# Altium PCB Rackmount_DSP.PcbDoc (part 4 of 24)
Units mil, origin at the board's own origin, x right, y up, seen from the top; angles counter-clockwise.
Board outline 10629.92 x 8267.72 mil, 4 copper layers (Top Layer, Mid Layer 1, Mid Layer 2, Bottom Layer), stack 36.2 mil thick; 4500 components, 1565 nets, 9765 pads, 3289 vias.
Unrouted connection lines stored in the file: 1.
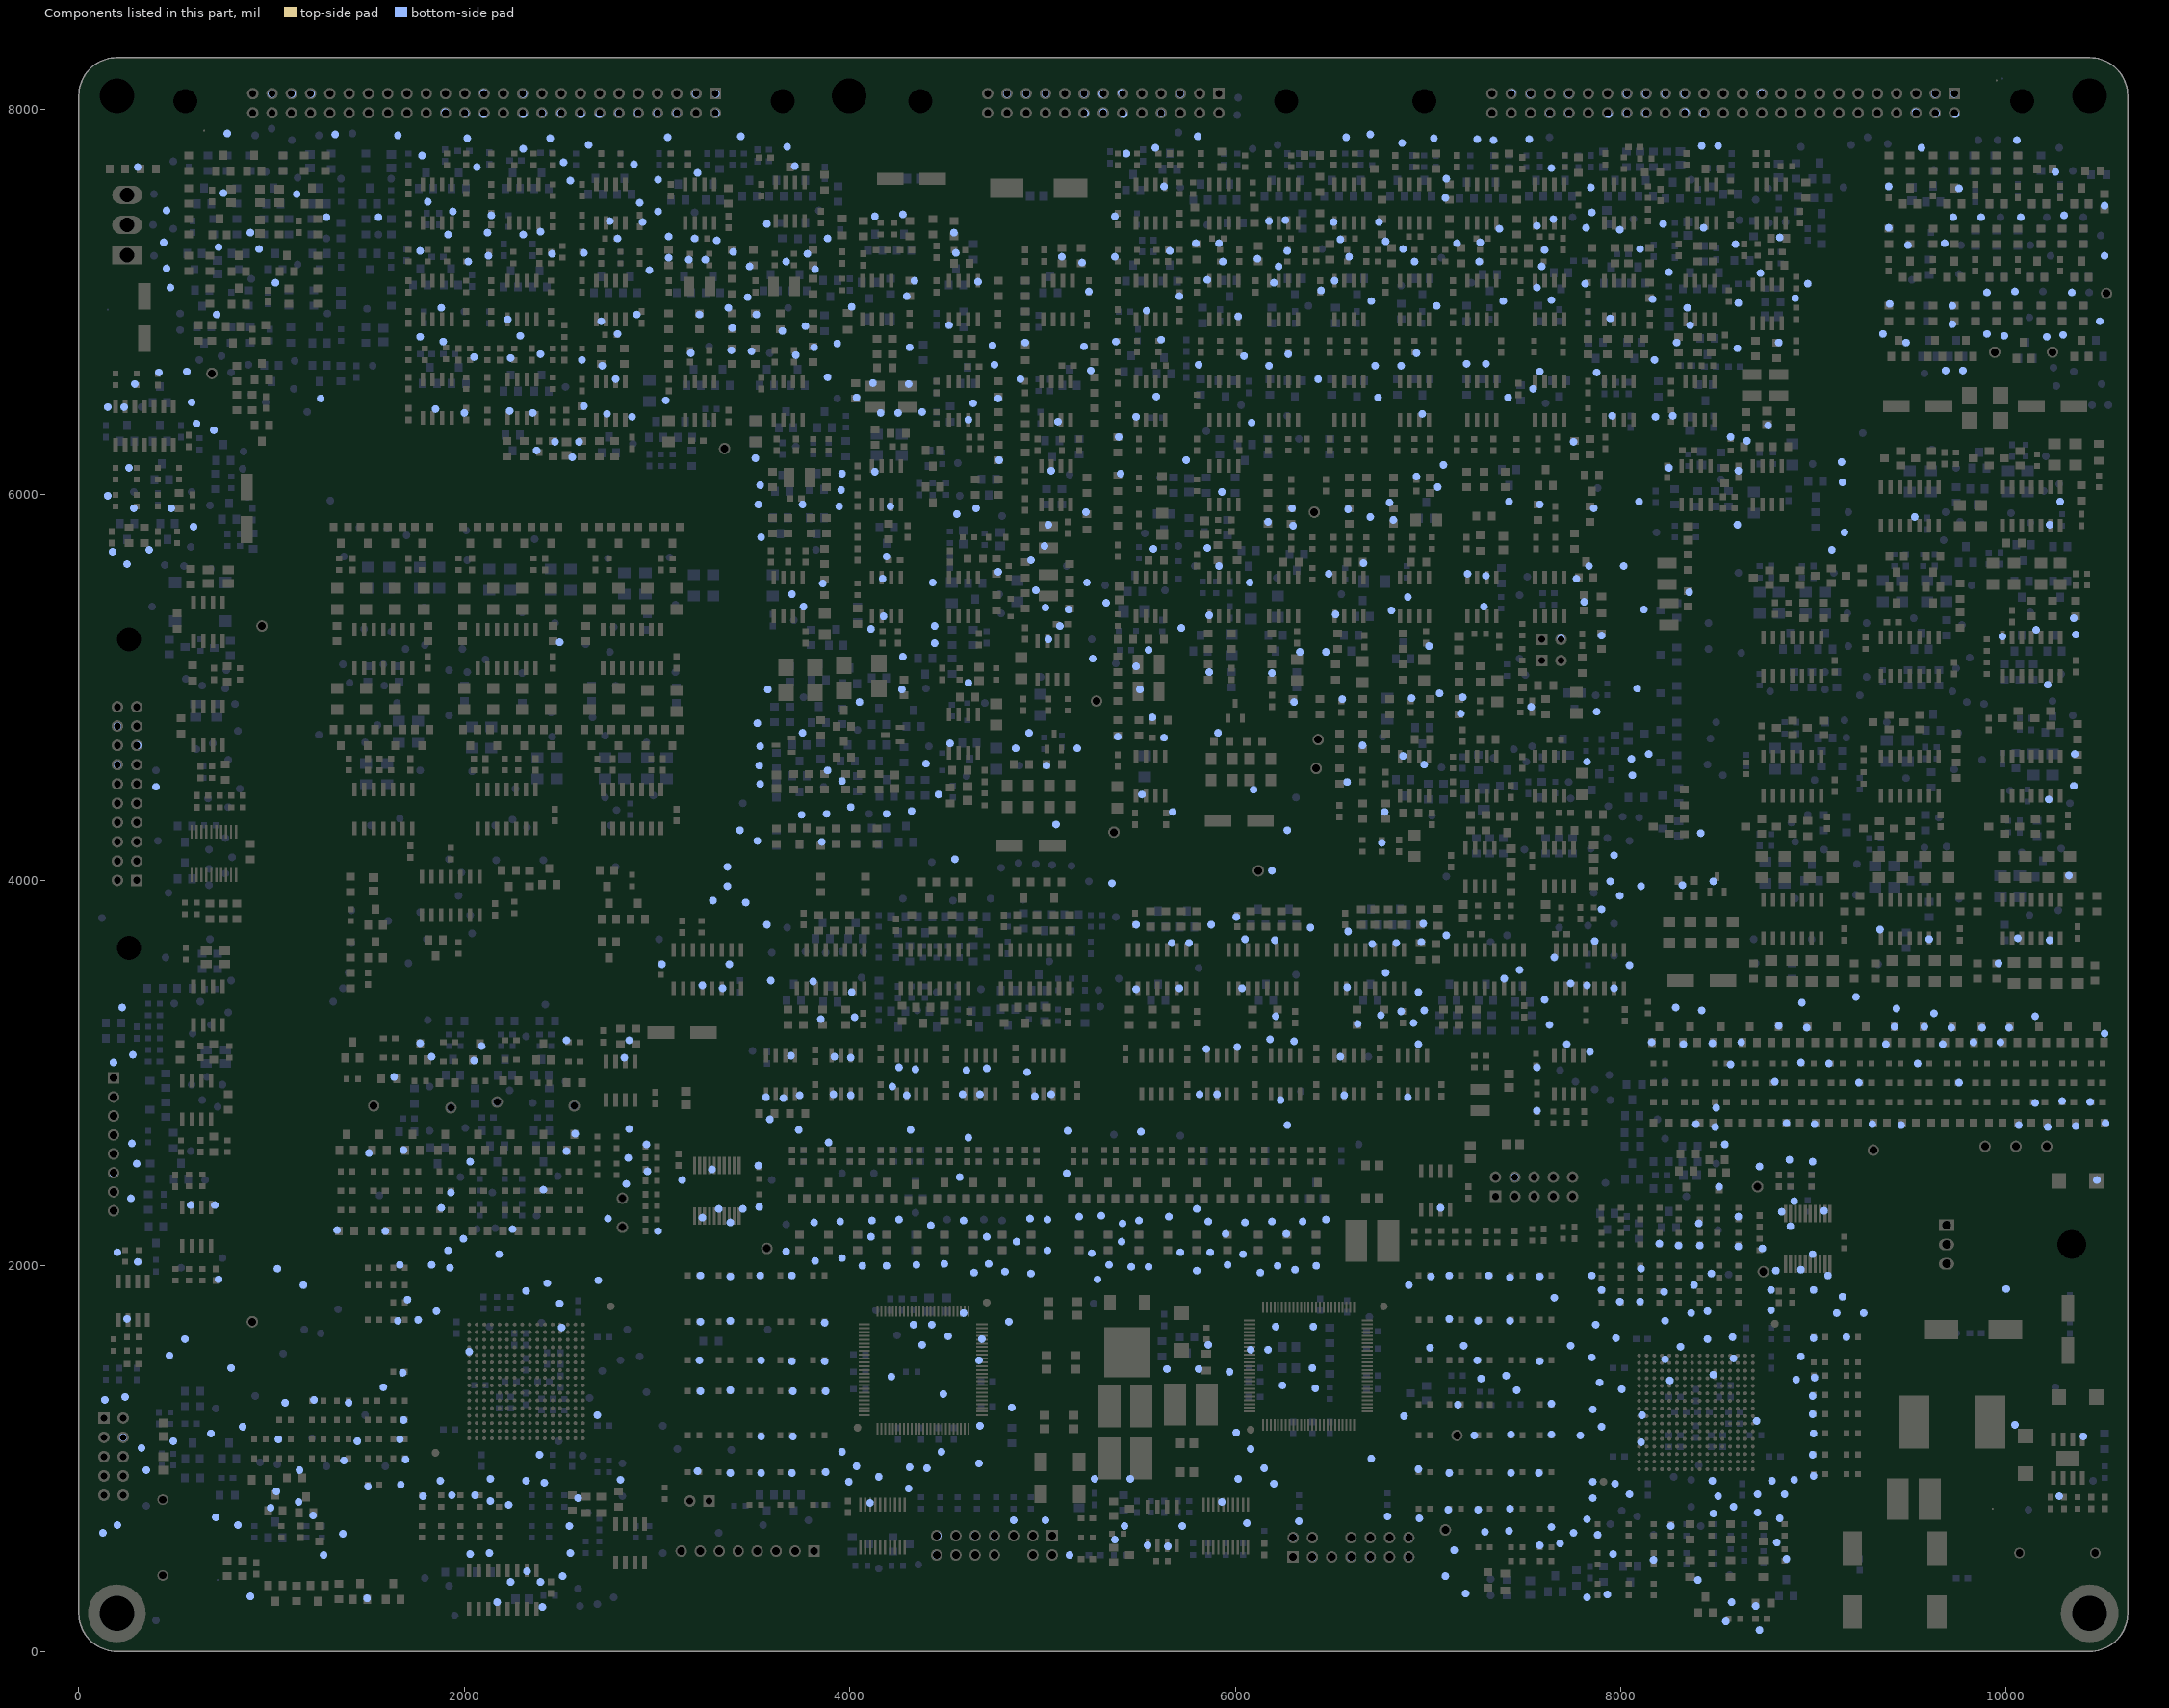
[diagram p6: the components of this part, seen from the top]

## Components (designator, comment, footprint, x,y, rotation, side; value= is the part's Value field where it differs from the comment) (continued)
TP275 "Comment" ict-smd40 7730,7980 r0 bottom
TP276 "Comment" ict-smd40 8030,7980 r0 bottom
TP277 "Comment" ict-smd40 2550,510 r0 bottom
TP278 "Comment" ict-smd40 1255,6500 r0 bottom
TP279 "Comment" ict-smd40 1655,7865 r0 bottom
TP283 "Comment" ict-smd40 3290,3895 r0 bottom
TP284 "Comment" ict-smd40 3570,3770 r0 bottom
TP285 "Comment" ict-smd40 3460,3885 r0 bottom
TP286 "Comment" ict-smd40 7875,4875 r0 bottom
TP288 "Comment" ict-smd40 6270,4260 r0 bottom
TP289 "Comment" ict-smd40 6095,4470 r0 bottom
TP290 "Comment" ict-smd40 7080,6155 r0 bottom
TP291 "Comment" ict-smd40 6085,6375 r0 bottom
TP293 "Comment" ict-smd40 5360,3985 r0 bottom
TP294 "Comment" ict-smd40 7865,3685 r0 bottom
TP295 "Comment" ict-smd40 8095,5965 r0 bottom
TP296 "Comment" ict-smd40 8420,3325 r0 bottom
TP297 "Comment" ict-smd40 560,6640 r0 bottom
TP298 "Comment" ict-smd40 770,7875 r0 bottom
TP299 "Comment" ict-smd40 300,2530 r0 bottom
TP300 "Comment" ict-smd40 275,2635 r0 bottom
TP301 "Comment" ict-smd40 125,615 r0 bottom
TP311 "Comment" ict-smd40 595,5835 r0 bottom
TP312 "Comment" ict-smd40 150,5995 r0 bottom
TP314 "Comment" ict-smd40 180,3055 r0 bottom
TP317 "Comment" ict-smd40 3055,7855 r0 bottom
TP318 "Comment" ict-smd40 8230,8080 r0 bottom
TP319 "Comment" ict-smd40 8575,255 r0 bottom
TP320 "Comment" ict-smd40 200,655 r0 bottom
TP321 "Comment" ict-smd40 9775,6645 r0 bottom
TP322 "Comment" ict-smd40 9685,6645 r0 bottom
TP323 "Comment" ict-smd40 10055,7840 r0 bottom
TP325 "Comment" ict-smd40 7965,3440 r0 bottom
TP326 "Comment" ict-smd40 3375,3565 r0 bottom
TP328 "Comment" ict-smd40 6940,6095 r0 bottom
TP329 "Comment" ict-smd40 5510,2695 r0 bottom
TP331 "Comment" ict-smd40 5130,2700 r0 bottom
TP332 "Comment" ict-smd40 3200,8080 r0 bottom
TP333 "Comment" ict-smd40 7730,8080 r0 bottom
TP334 "Comment" ict-smd40 8030,8080 r0 bottom
TP335 "Comment" ict-smd40 1165,1900 r0 bottom
TP336 "Comment" ict-smd40 1030,1985 r0 bottom
TP337 "Comment" ict-smd40 700,6335 r0 bottom
TP338 "Comment" ict-smd40 585,6480 r0 bottom
TP339 "Comment" ict-smd40 365,5715 r0 bottom
TP340 "Comment" ict-smd40 9560,7800 r0 bottom
TP341 "Comment" ict-smd40 1915,2080 r0 bottom
TP343 "Comment" ict-smd40 2570,2830 r0 bottom
TP344 "Comment" ict-smd40 1995,2140 r0 bottom
TP345 "Comment" ict-smd40 1925,1990 r0 bottom
TP347 "Comment" ict-smd40 2180,2060 r0 bottom
TP349 "Comment" ict-smd40 1760,1720 r0 bottom
TP352 "Comment" ict-smd40 1830,2005 r0 bottom
TP353 "Comment" ict-smd40 4475,1035 r0 bottom
TP354 "Comment" ict-smd40 2415,875 r0 bottom
TP355 "Comment" ict-smd40 1445,1090 r0 bottom
TP356 "Comment" ict-smd40 2320,885 r0 bottom
TP357 "Comment" ict-smd40 1145,940 r0 bottom
TP358 "Comment" ict-smd40 1855,1765 r0 bottom
TP359 "Comment" ict-smd40 1935,810 r0 bottom
TP360 "Comment" ict-smd40 2390,1020 r0 bottom
TP361 "Comment" ict-smd40 2230,760 r0 bottom
TP362 "Comment" ict-smd40 2240,360 r0 bottom
TP363 "Comment" ict-smd40 2545,650 r0 bottom
TP364 "Comment" ict-smd40 4675,1170 r0 bottom
TP366 "Comment" ict-smd40 2025,1555 r0 bottom
TP368 "Comment" ict-smd40 4545,4110 r0 bottom
TP369 "Comment" ict-smd40 5070,4290 r0 bottom
TP370 "Comment" ict-smd40 4440,5320 r0 bottom
TP372 "Comment" ict-smd40 8105,3970 r0 bottom
TP373 "Comment" ict-smd40 7965,4130 r0 bottom
TP375 "Comment" ict-smd40 8320,3975 r0 bottom
TP376 "Comment" ict-smd40 3590,3480 r0 bottom
TP377 "Comment" ict-smd40 790,1470 r0 bottom
TP378 "Comment" ict-smd40 2505,1680 r0 bottom
TP382 "Comment" ict-smd40 1220,1305 r0 bottom
TP383 "Comment" ict-smd40 710,695 r0 bottom
TP384 "Comment" ict-smd40 2855,3170 r0 bottom
TP385 "Comment" ict-smd40 2495,1805 r0 bottom
TP386 "Comment" ict-smd40 2695,1925 r0 bottom
TP388 "Comment" ict-smd40 8255,1405 r0 bottom
TP389 "Comment" ict-smd40 7870,1695 r0 bottom
TP390 "Comment" ict-smd40 7850,1525 r0 bottom
TP391 "Comment" ict-smd40 6005,1135 r0 bottom
TP392 "Comment" ict-smd40 5930,775 r0 bottom
TP393 "Comment" ict-smd40 6080,1050 r0 bottom
TP394 "Comment" ict-smd40 6060,665 r0 bottom
TP395 "Comment" ict-smd40 6150,950 r0 bottom
TP396 "Comment" ict-smd40 6200,870 r0 bottom
TP397 "Comment" ict-smd40 7855,880 r0 bottom
TP398 "Comment" ict-smd40 7855,1255 r0 bottom
TP399 "Comment" ict-smd40 7975,1625 r0 bottom
TP400 "Comment" ict-smd40 6270,2730 r0 bottom
TP401 "Comment" ict-smd40 5675,4355 r0 bottom
TP403 "Comment" ict-smd40 7655,3600 r0 bottom
TP405 "Comment" ict-smd40 3520,4205 r0 bottom
TP406 "Comment" ict-smd40 3430,4260 r0 bottom
TP407 "Comment" ict-smd40 4315,2705 r0 bottom
TP408 "Comment" ict-smd40 3585,2760 r0 bottom
TP409 "Comment" ict-smd40 2830,3080 r0 bottom
TP410 "Comment" ict-smd40 2120,7360 r0 bottom
TP411 "Comment" ict-smd40 8015,5630 r0 bottom
TP412 "Comment" ict-smd40 4840,1265 r0 bottom
TP413 "Comment" ict-smd40 6705,1000 r0 bottom
TP414 "Comment" ict-smd40 4850,680 r0 bottom
TP415 "Comment" ict-smd40 5015,680 r0 bottom
TP416 "Comment" ict-smd40 4670,975 r0 bottom
TP417 "Comment" ict-smd40 4400,950 r0 bottom
TP418 "Comment" ict-smd40 4310,955 r0 bottom
TP419 "Comment" ict-smd40 3960,1035 r0 bottom
TP420 "Comment" ict-smd40 4105,770 r0 bottom
TP421 "Comment" ict-smd40 4035,960 r0 bottom
TP422 "Comment" ict-smd40 4150,905 r0 bottom
TP423 "Comment" ict-smd40 4425,1695 r0 bottom
TP424 "Comment" ict-smd40 3890,2640 r0 bottom
TP425 "Comment" ict-smd40 3235,3455 r0 bottom
TP426 "Comment" ict-smd40 350,940 r0 bottom
TP427 "Comment" ict-smd40 325,1055 r0 bottom
TP428 "Comment" ict-smd40 240,1320 r0 bottom
TP429 "Comment" ict-smd40 135,1305 r0 bottom
TP430 "Comment" ict-smd40 4305,845 r0 bottom
TP431 "Comment" ict-smd40 8470,1960 r0 bottom
TP432 "Comment" ict-smd40 8310,1580 r0 bottom
TP433 "Comment" ict-smd40 8480,1435 r0 bottom
TP434 "Comment" ict-smd40 9430,3335 r0 bottom
TP435 "Comment" ict-smd40 8585,1520 r0 bottom
TP436 "Comment" ict-smd40 8940,3365 r0 bottom
TP437 "Comment" ict-smd40 9150,1840 r0 bottom
TP438 "Comment" ict-smd40 8450,1620 r0 bottom
TP439 "Comment" ict-smd40 8780,1770 r0 bottom
TP440 "Comment" ict-smd40 8225,1865 r0 bottom
TP441 "Comment" ict-smd40 8825,690 r0 bottom
TP442 "Comment" ict-smd40 8480,715 r0 bottom
TP443 "Comment" ict-smd40 8230,1715 r0 bottom
TP444 "Comment" ict-smd40 8580,1630 r0 bottom
TP445 "Comment" ict-smd40 8475,885 r0 bottom
TP446 "Comment" ict-smd40 8710,720 r0 bottom
TP447 "Comment" ict-smd40 5800,2295 r0 bottom
TP448 "Comment" ict-smd40 4935,2245 r0 bottom
TP449 "Comment" ict-smd40 9000,1875 r0 bottom
TP450 "Comment" ict-smd40 8780,1875 r0 bottom
TP451 "Comment" ict-smd40 9075,1950 r0 bottom
TP452 "Comment" ict-smd40 6780,3520 r0 bottom
TP453 "Comment" ict-smd40 8110,1225 r0 bottom
TP454 "Comment" ict-smd40 8230,1515 r0 bottom
TP455 "Comment" ict-smd40 550,1620 r0 bottom
TP456 "Comment" ict-smd40 7840,3110 r0 bottom
TP457 "Comment" ict-smd40 7630,3250 r0 bottom
TP458 "Comment" ict-smd40 7720,3150 r0 bottom
TP460 "Comment" ict-smd40 9160,5805 r0 bottom
TP462 "Comment" ict-smd40 9120,1755 r0 bottom
TP463 "Comment" ict-smd40 9625,3310 r0 bottom
TP464 "Comment" ict-smd40 9260,1755 r0 bottom
TP465 "Comment" ict-smd40 10150,3295 r0 bottom
TP466 "Comment" ict-smd40 5305,2260 r0 bottom
TP467 "Comment" ict-smd40 5500,2235 r0 bottom
TP468 "Comment" ict-smd40 6190,2230 r0 bottom
TP469 "Comment" ict-smd40 3780,7250 r0 bottom
TP470 "Comment" ict-smd40 8145,4655 r0 bottom
TP471 "Comment" ict-smd40 400,4485 r0 bottom
TP473 "Comment" ict-smd40 7755,615 r0 bottom
TP474 "Comment" ict-smd40 6470,2240 r0 bottom
TP475 "Comment" ict-smd40 4050,4925 r0 bottom
TP476 "Comment" ict-smd40 7640,645 r0 bottom
TP477 "Comment" ict-smd40 7855,795 r0 bottom
TP478 "Comment" ict-smd40 8120,5405 r0 bottom
TP479 "Comment" ict-smd40 7195,300 r0 bottom
TP480 "Comment" ict-smd40 4010,6975 r0 bottom
TP481 "Comment" ict-smd40 8085,4995 r0 bottom
TP482 "Comment" ict-smd40 3735,2705 r0 bottom
TP483 "Comment" ict-smd40 7995,3920 r0 bottom
TP484 "Comment" ict-smd40 8400,370 r0 bottom
TP485 "Comment" ict-smd40 8060,4545 r0 bottom
TP486 "Comment" ict-smd40 7900,3850 r0 bottom
TP487 "Comment" ict-smd40 850,1165 r0 bottom
TP488 "Comment" ict-smd40 3365,3970 r0 bottom
TP489 "Comment" ict-smd40 3365,4070 r0 bottom
TP490 "Comment" ict-smd40 7945,3995 r0 bottom
TP492 "Comment" ict-smd40 8430,7980 r0 bottom
TP495 "Comment" ict-smd40 7790,1120 r0 bottom
TP496 "Comment" ict-smd40 7740,1585 r0 bottom
TP497 "Comment" ict-smd40 7460,1355 r0 bottom
TP498 "Comment" ict-smd40 7900,1165 r0 bottom
TP499 "Comment" ict-smd40 8105,1085 r0 bottom
TP500 "Comment" ict-smd40 8910,1410 r0 bottom
TP501 "Comment" ict-smd40 7655,1835 r0 bottom
TP502 "Comment" ict-smd40 6900,1900 r0 bottom
TP503 "Comment" ict-smd40 8005,1360 r0 bottom
TP504 "Comment" ict-smd40 7405,1430 r0 bottom
TP505 "Comment" ict-smd40 5455,895 r0 bottom
TP506 "Comment" ict-smd40 8835,2280 r0 bottom
TP507 "Comment" ict-smd40 7690,5255 r0 bottom
TP509 "Comment" ict-smd40 8510,2410 r0 bottom
TP510 "Comment" ict-smd40 1370,610 r0 bottom
TP511 "Comment" ict-smd40 200,4800 r0 bottom
TP512 "Comment" ict-smd40 3005,7470 r0 bottom
TP513 "Comment" ict-smd40 7900,1875 r0 bottom
TP514 "Comment" ict-smd40 8610,6125 r0 bottom
TP515 "Comment" ict-smd40 8430,7385 r0 bottom
TP516 "Comment" ict-smd40 8290,6790 r0 bottom
TP517 "Comment" ict-smd40 3305,8080 r0 bottom
TP518 "Comment" ict-smd40 10515,2740 r0 bottom
TP519 "Comment" ict-smd40 10510,3205 r0 bottom
TP520 "Comment" ict-smd40 10360,2725 r0 bottom
TP522 "Comment" ict-smd40 6190,4050 r0 bottom
TP523 "Comment" ict-smd40 6235,2860 r0 bottom
TP524 "Comment" ict-smd40 7060,4970 r0 bottom
TP525 "Comment" ict-smd40 6895,2875 r0 bottom
TP526 "Comment" ict-smd40 6010,3135 r0 bottom
TP527 "Comment" ict-smd40 6565,2885 r0 bottom
TP528 "Comment" ict-smd40 6305,3165 r0 bottom
TP529 "Comment" ict-smd40 6635,3255 r0 bottom
TP530 "Comment" ict-smd40 6950,3150 r0 bottom
TP531 "Comment" ict-smd40 5905,2890 r0 bottom
TP533 "Comment" ict-smd40 1105,8080 r0 bottom
TP534 "Comment" ict-smd40 1035,1100 r0 bottom
TP535 "Comment" ict-smd40 1000,8080 r0 bottom
TP536 "Comment" ict-smd40 8130,8080 r0 bottom
TP537 "Comment" ict-smd40 7535,4900 r0 bottom
TP538 "Comment" ict-smd40 8970,7095 r0 bottom
TP539 "Comment" ict-smd40 8130,7980 r0 bottom
TP540 "Comment" ict-smd40 4395,4605 r0 bottom
TP541 "Comment" ict-smd40 5395,6300 r0 bottom
TP542 "Comment" ict-smd40 4770,6500 r0 bottom
TP543 "Comment" ict-smd40 4675,2890 r0 bottom
TP544 "Comment" ict-smd40 5230,5545 r0 bottom
TP545 "Comment" ict-smd40 4615,2665 r0 bottom
TP546 "Comment" ict-smd40 5045,2890 r0 bottom
TP547 "Comment" ict-smd40 5260,5150 r0 bottom
TP548 "Comment" ict-smd40 5215,6770 r0 bottom
TP549 "Comment" ict-smd40 4740,6775 r0 bottom
TP551 "Comment" ict-smd40 4310,6765 r0 bottom
TP554 "Comment" ict-smd40 4210,5940 r0 bottom
TP555 "Comment" ict-smd40 5015,8080 r0 bottom
TP556 "Comment" ict-smd40 4915,8080 r0 bottom
TP557 "Comment" ict-smd40 4815,8080 r0 bottom
TP558 "Comment" ict-smd40 4340,3020 r0 bottom
TP559 "Comment" ict-smd40 4615,6390 r0 bottom
TP560 "Comment" ict-smd40 4295,2885 r0 bottom
TP561 "Comment" ict-smd40 4175,5370 r0 bottom
TP562 "Comment" ict-smd40 4710,3025 r0 bottom
TP563 "Comment" ict-smd40 1140,775 r0 bottom
TP564 "Comment" ict-smd40 3445,2295 r0 bottom
TP565 "Comment" ict-smd40 3320,2295 r0 bottom
TP566 "Comment" ict-smd40 3380,2225 r0 bottom
TP567 "Comment" ict-smd40 1930,2380 r0 bottom
TP568 "Comment" ict-smd40 2170,2850 r0 bottom
TP569 "Comment" ict-smd40 2090,3140 r0 bottom
TP570 "Comment" ict-smd40 1590,2180 r0 bottom
TP572 "Comment" ict-smd40 1930,2820 r0 bottom
TP573 "Comment" ict-smd40 1770,3155 r0 bottom
TP575 "Comment" ict-smd40 2495,5235 r0 bottom
TP576 "Comment" ict-smd40 2575,2685 r0 bottom
TP577 "Comment" ict-smd40 2810,890 r0 bottom
TP578 "Comment" ict-smd40 2590,795 r0 bottom
TP579 "Comment" ict-smd40 2325,415 r0 bottom
TP580 "Comment" ict-smd40 2170,255 r0 bottom
TP581 "Comment" ict-smd40 1665,2005 r0 bottom
TP582 "Comment" ict-smd40 1655,1715 r0 bottom
TP583 "Comment" ict-smd40 1685,1200 r0 bottom
TP584 "Comment" ict-smd40 1785,805 r0 bottom
TP585 "Comment" ict-smd40 2055,810 r0 bottom
TP586 "Comment" ict-smd40 2135,895 r0 bottom
TP587 "Comment" ict-smd40 2135,780 r0 bottom
TP588 "Comment" ict-smd40 1875,885 r0 bottom
TP592 "Comment" ict-smd40 2430,1910 r0 bottom
TP593 "Comment" ict-smd40 1705,1825 r0 bottom
TP594 "Comment" ict-smd40 1680,1445 r0 bottom
TP595 "Comment" ict-smd40 1580,1370 r0 bottom
TP596 "Comment" ict-smd40 2850,2560 r0 bottom
TP597 "Comment" ict-smd40 1375,990 r0 bottom
TP598 "Comment" ict-smd40 1670,865 r0 bottom
TP599 "Comment" ict-smd40 1665,1100 r0 bottom
TP600 "Comment" ict-smd40 1400,1290 r0 bottom
TP601 "Comment" ict-smd40 1695,995 r0 bottom
TP602 "Comment" ict-smd40 3380,1945 r0 bottom
TP603 "Comment" ict-smd40 3700,1950 r0 bottom
TP604 "Comment" ict-smd40 3535,1950 r0 bottom
TP605 "Comment" ict-smd40 3225,1950 r0 bottom
TP606 "Comment" ict-smd40 3380,1715 r0 bottom
TP607 "Comment" ict-smd40 3220,1510 r0 bottom
TP608 "Comment" ict-smd40 3540,1510 r0 bottom
TP609 "Comment" ict-smd40 3700,1505 r0 bottom
TP610 "Comment" ict-smd40 3870,1505 r0 bottom
TP611 "Comment" ict-smd40 3380,1355 r0 bottom
TP612 "Comment" ict-smd40 3705,1350 r0 bottom
TP613 "Comment" ict-smd40 3540,925 r0 bottom
TP614 "Comment" ict-smd40 3210,935 r0 bottom
TP615 "Comment" ict-smd40 3995,880 r0 bottom
TP616 "Comment" ict-smd40 3225,1710 r0 bottom
TP617 "Comment" ict-smd40 3870,1705 r0 bottom
TP618 "Comment" ict-smd40 3225,1350 r0 bottom
TP619 "Comment" ict-smd40 3875,1350 r0 bottom
TP620 "Comment" ict-smd40 3540,1115 r0 bottom
TP621 "Comment" ict-smd40 3705,1115 r0 bottom
TP622 "Comment" ict-smd40 3380,925 r0 bottom
TP623 "Comment" ict-smd40 3700,925 r0 bottom
TP624 "Comment" ict-smd40 3875,930 r0 bottom
TP625 "Comment" ict-smd40 4485,1335 r0 bottom
TP626 "Comment" ict-smd40 4590,2235 r0 bottom
TP627 "Comment" ict-smd40 4710,2150 r0 bottom
TP628 "Comment" ict-smd40 4420,2210 r0 bottom
TP629 "Comment" ict-smd40 4570,2460 r0 bottom
TP630 "Comment" ict-smd40 4115,2235 r0 bottom
TP631 "Comment" ict-smd40 3950,2230 r0 bottom
TP632 "Comment" ict-smd40 3815,2225 r0 bottom
TP634 "Comment" ict-smd40 2690,1225 r0 bottom
TP635 "Comment" ict-smd40 200,4600 r0 bottom
TP636 "Comment" ict-smd40 4255,2240 r0 bottom
TP637 "Comment" ict-smd40 5025,2240 r0 bottom
TP638 "Comment" ict-smd40 3340,3440 r0 bottom
TP639 "Comment" ict-smd40 7435,8085 r0 bottom
TP641 "Comment" ict-smd40 5615,7980 r0 bottom
TP642 "Comment" ict-smd40 5715,8080 r0 bottom
TP643 "Comment" ict-smd40 5805,7860 r0 bottom
TP644 "Comment" ict-smd40 250,5640 r0 bottom
TP645 "Comment" ict-smd40 9730,8080 r0 bottom
TP646 "Comment" ict-smd40 9735,7975 r0 bottom
TP647 "Comment" ict-smd40 9630,8080 r0 bottom
TP648 "Comment" ict-smd40 9635,7980 r0 bottom
TP649 "Comment" ict-smd40 9530,7985 r0 bottom
TP650 "Comment" ict-smd40 1330,7870 r0 bottom
TP651 "Comment" ict-smd40 1070,1290 r0 bottom
TP652 "Comment" ict-smd40 1205,8080 r0 bottom
TP654 "Comment" ict-smd40 8330,8080 r0 bottom
TP655 "Comment" ict-smd40 7935,7975 r0 bottom
TP656 "Comment" ict-smd40 8360,6880 r0 bottom
TP657 "Comment" ict-smd40 3305,7980 r0 bottom
TP658 "Comment" ict-smd40 7630,7980 r0 bottom
TP659 "Comment" ict-smd40 7820,7385 r0 bottom
TP660 "Comment" ict-smd40 2500,7980 r0 bottom
TP661 "Comment" ict-smd40 2405,7980 r0 bottom
TP662 "Comment" ict-smd40 2305,7975 r0 bottom
TP663 "Comment" ict-smd40 5420,7975 r0 bottom
TP664 "Comment" ict-smd40 5315,7985 r0 bottom
TP665 "Comment" ict-smd40 5220,7980 r0 bottom
TP666 "Comment" ict-smd40 2800,7980 r0 bottom
TP667 "Comment" ict-smd40 3100,7980 r0 bottom
TP668 "Comment" ict-smd40 2700,7975 r0 bottom
TP669 "Comment" ict-smd40 3000,7980 r0 bottom
TP670 "Comment" ict-smd40 2605,7975 r0 bottom
TP671 "Comment" ict-smd40 2900,7980 r0 bottom
TP672 "Comment" ict-smd40 305,4700 r0 bottom
TP673 "Comment" ict-smd40 3310,7320 r0 bottom
TP675 "Comment" ict-smd40 2645,7815 r0 bottom
TP676 "Comment" ict-smd40 2795,7330 r0 bottom
TP677 "Comment" ict-smd40 2925,7415 r0 bottom
TP678 "Comment" ict-smd40 2795,6835 r0 bottom
TP679 "Comment" ict-smd40 6485,5590 r0 bottom
TP680 "Comment" ict-smd40 6300,5840 r0 bottom
TP682 "Comment" ict-smd40 6895,5470 r0 bottom
TP683 "Comment" ict-smd40 4940,5660 r0 bottom
TP684 "Comment" ict-smd40 6760,4195 r0 bottom
TP685 "Comment" ict-smd40 2100,7975 r0 bottom
TP686 "Comment" ict-smd40 2005,7980 r0 bottom
TP687 "Comment" ict-smd40 1900,7985 r0 bottom
TP688 "Comment" ict-smd40 2100,8085 r0 bottom
TP698 "Comment" ict-smd40 9095,5715 r0 bottom
TP699 "Comment" ict-smd40 8730,8085 r0 bottom
TP700 "Comment" ict-smd40 7825,3455 r0 bottom
TP701 "Comment" ict-smd40 7740,3465 r0 bottom
TP702 "Comment" ict-smd40 180,2480 r0 bottom
TP703 "Comment" ict-smd40 8860,480 r0 bottom
TP704 "Comment" ict-smd40 470,1535 r0 bottom
TP705 "Comment" ict-smd40 7475,3535 r0 bottom
TP706 "Comment" ict-smd40 6950,3420 r0 bottom
TP707 "Comment" ict-smd40 6400,1470 r0 bottom
TP708 "Comment" ict-smd40 5655,2255 r0 bottom
TP709 "Comment" ict-smd40 5410,2125 r0 bottom
TP710 "Comment" ict-smd40 5860,2230 r0 bottom
TP711 "Comment" ict-smd40 5415,2220 r0 bottom
TP712 "Comment" ict-smd40 6050,2225 r0 bottom
TP713 "Comment" ict-smd40 5125,2480 r0 bottom
TP714 "Comment" ict-smd40 5950,2165 r0 bottom
TP715 "Comment" ict-smd40 6265,2165 r0 bottom
TP716 "Comment" ict-smd40 7010,1575 r0 bottom
TP717 "Comment" ict-smd40 10215,2720 r0 bottom
TP718 "Comment" ict-smd40 9875,3235 r0 bottom
TP719 "Comment" ict-smd40 9455,2730 r0 bottom
TP720 "Comment" ict-smd40 9420,3240 r0 bottom
TP721 "Comment" ict-smd40 10065,2730 r0 bottom
TP722 "Comment" ict-smd40 10015,3235 r0 bottom
TP723 "Comment" ict-smd40 9755,2950 r0 bottom
TP724 "Comment" ict-smd40 9715,3235 r0 bottom
TP725 "Comment" ict-smd40 8570,3045 r0 bottom
TP726 "Comment" ict-smd40 9575,3240 r0 bottom
TP727 "Comment" ict-smd40 8860,2740 r0 bottom
TP728 "Comment" ict-smd40 8820,3245 r0 bottom
TP729 "Comment" ict-smd40 9005,2735 r0 bottom
TP730 "Comment" ict-smd40 8965,3235 r0 bottom
TP731 "Comment" ict-smd40 9305,2735 r0 bottom
TP732 "Comment" ict-smd40 9220,3395 r0 bottom
TP733 "Comment" ict-smd40 8585,750 r0 bottom
TP734 "Comment" ict-smd40 8505,805 r0 bottom
TP735 "Comment" ict-smd40 7065,2300 r0 bottom
TP736 "Comment" ict-smd40 8105,1985 r0 bottom
TP737 "Comment" ict-smd40 7995,1815 r0 bottom
TP738 "Comment" ict-smd40 8100,1815 r0 bottom
TP739 "Comment" ict-smd40 8850,815 r0 bottom
TP740 "Comment" ict-smd40 8410,2105 r0 bottom
TP741 "Comment" ict-smd40 8170,475 r0 bottom
TP742 "Comment" ict-smd40 8260,650 r0 bottom
TP744 "Comment" ict-smd40 8365,1755 r0 bottom
TP745 "Comment" ict-smd40 8450,1765 r0 bottom
TP746 "Comment" ict-smd40 8610,2100 r0 bottom
TP747 "Comment" ict-smd40 8710,815 r0 bottom
TP748 "Comment" ict-smd40 9000,1625 r0 bottom
TP749 "Comment" ict-smd40 7850,1950 r0 bottom
TP750 "Comment" ict-smd40 8200,2115 r0 bottom
TP751 "Comment" ict-smd40 8300,2105 r0 bottom
TP752 "Comment" ict-smd40 9005,1420 r0 bottom
TP753 "Comment" ict-smd40 8935,1530 r0 bottom
TP754 "Comment" ict-smd40 9000,910 r0 bottom
TP755 "Comment" ict-smd40 9000,1130 r0 bottom
TP756 "Comment" ict-smd40 8995,1020 r0 bottom
TP757 "Comment" ict-smd40 8995,1230 r0 bottom
TP758 "Comment" ict-smd40 8995,1325 r0 bottom
TP759 "Comment" ict-smd40 7425,740 r0 bottom
TP760 "Comment" ict-smd40 7105,735 r0 bottom
TP761 "Comment" ict-smd40 7260,735 r0 bottom
TP762 "Comment" ict-smd40 7110,925 r0 bottom
TP763 "Comment" ict-smd40 7430,925 r0 bottom
TP764 "Comment" ict-smd40 7430,1125 r0 bottom
TP765 "Comment" ict-smd40 7640,1125 r0 bottom
TP766 "Comment" ict-smd40 6875,1220 r0 bottom
TP767 "Comment" ict-smd40 7580,1505 r0 bottom
TP768 "Comment" ict-smd40 7260,1715 r0 bottom
TP769 "Comment" ict-smd40 7110,1950 r0 bottom
TP770 "Comment" ict-smd40 7015,1945 r0 bottom
TP771 "Comment" ict-smd40 6950,945 r0 bottom
TP772 "Comment" ict-smd40 7575,925 r0 bottom
TP773 "Comment" ict-smd40 7240,1120 r0 bottom
TP774 "Comment" ict-smd40 7155,1280 r0 bottom
TP775 "Comment" ict-smd40 7640,1285 r0 bottom
TP776 "Comment" ict-smd40 7255,1510 r0 bottom
TP777 "Comment" ict-smd40 7890,1395 r0 bottom
TP778 "Comment" ict-smd40 7425,1715 r0 bottom
TP779 "Comment" ict-smd40 7185,1585 r0 bottom
TP780 "Comment" ict-smd40 7110,1725 r0 bottom
TP781 "Comment" ict-smd40 7580,1945 r0 bottom
TP782 "Comment" ict-smd40 7425,1940 r0 bottom
TP783 "Comment" ict-smd40 7315,1950 r0 bottom
TP784 "Comment" ict-smd40 6955,690 r0 bottom
TP785 "Comment" ict-smd40 8785,885 r0 bottom
TP786 "Comment" ict-smd40 2510,390 r0 bottom
TP787 "Comment" ict-smd40 7930,295 r0 bottom
TP792 "Comment" ict-smd40 7880,605 r180 bottom
TP793 "Comment" ict-smd40 7090,390 r0 bottom
TP794 "Comment" ict-smd40 7135,525 r0 bottom
TP795 "Comment" ict-smd40 7420,625 r0 bottom
TP796 "Comment" ict-smd40 7580,550 r0 bottom
TP797 "Comment" ict-smd40 8285,3340 r0 bottom
TP798 "Comment" ict-smd40 8705,1195 r0 bottom
TP799 "Comment" ict-smd40 5190,2255 r0 bottom
TP800 "Comment" ict-smd40 6350,2230 r0 bottom
TP801 "Comment" ict-smd40 8720,110 r0 bottom
TP802 "Comment" ict-smd40 8900,890 r0 bottom
TP803 "Comment" ict-smd40 440,7310 r0 bottom
TP804 "Comment" ict-smd40 8335,7985 r0 bottom
TP805 "Comment" ict-smd40 8495,2820 r0 bottom
TP806 "Comment" ict-smd40 4025,3290 r0 bottom
TP807 "Comment" ict-smd40 4005,3080 r0 bottom
TP808 "Comment" ict-smd40 4005,2885 r0 bottom
TP809 "Comment" ict-smd40 3695,3090 r0 bottom
TP812 "Comment" ict-smd40 7995,7375 r0 bottom
TP813 "Comment" ict-smd40 7530,8080 r0 bottom
TP814 "Comment" ict-smd40 1770,6820 r0 bottom
TP815 "Comment" ict-smd40 1915,7350 r0 bottom
TP816 "Comment" ict-smd40 2305,8080 r0 bottom
TP817 "Comment" ict-smd40 3025,3565 r0 bottom
TP818 "Comment" ict-smd40 5410,8085 r0 bottom
TP819 "Comment" ict-smd40 5310,8080 r0 bottom
TP820 "Comment" ict-smd40 5215,8080 r0 bottom
TP821 "Comment" ict-smd40 2290,6825 r0 bottom
TP822 "Comment" ict-smd40 3885,6610 r0 bottom
TP823 "Comment" ict-smd40 2610,6700 r0 bottom
TP824 "Comment" ict-smd40 2305,7350 r0 bottom
TP825 "Comment" ict-smd40 3670,7210 r0 bottom
TP826 "Comment" ict-smd40 2305,7795 r0 bottom
TP827 "Comment" ict-smd40 3060,7340 r0 bottom
TP828 "Comment" ict-smd40 8165,7015 r0 bottom
TP829 "Comment" ict-smd40 7755,6275 r0 bottom
TP830 "Comment" ict-smd40 5180,4685 r0 bottom
TP831 "Comment" ict-smd40 5910,4765 r0 bottom
TP832 "Comment" ict-smd40 5020,4595 r0 bottom
TP834 "Comment" ict-smd40 5025,2080 r0 bottom
TP835 "Comment" ict-smd40 6080,1565 r0 bottom
TP836 "Comment" ict-smd40 5285,1930 r0 bottom
TP837 "Comment" ict-smd40 5255,2065 r0 bottom
TP838 "Comment" ict-smd40 5345,2005 r0 bottom
TP839 "Comment" ict-smd40 5460,1995 r0 bottom
TP840 "Comment" ict-smd40 5550,1995 r0 bottom
TP841 "Comment" ict-smd40 5715,2070 r0 bottom
TP842 "Comment" ict-smd40 6130,1965 r0 bottom
TP843 "Comment" ict-smd40 5960,2005 r0 bottom
TP844 "Comment" ict-smd40 5870,2070 r0 bottom
TP845 "Comment" ict-smd40 5800,1975 r0 bottom
TP846 "Comment" ict-smd40 6420,2000 r0 bottom
TP847 "Comment" ict-smd40 6310,1980 r0 bottom
TP848 "Comment" ict-smd40 6220,2000 r0 bottom
TP849 "Comment" ict-smd40 6040,2060 r0 bottom
TP850 "Comment" ict-smd40 5970,1450 r0 bottom
TP851 "Comment" ict-smd40 6245,1380 r0 bottom
TP852 "Comment" ict-smd40 6170,1565 r0 bottom
TP853 "Comment" ict-smd40 6415,1365 r0 bottom
TP854 "Comment" ict-smd40 6015,895 r0 bottom
TP855 "Comment" ict-smd40 6790,700 r0 bottom
TP856 "Comment" ict-smd40 6330,675 r0 bottom
TP857 "Comment" ict-smd40 6400,490 r0 bottom
TP858 "Comment" ict-smd40 6600,490 r0 bottom
TP859 "Comment" ict-smd40 6700,490 r0 bottom
TP860 "Comment" ict-smd40 6900,490 r0 bottom
TP861 "Comment" ict-smd40 6900,590 r0 bottom
TP862 "Comment" ict-smd40 6300,590 r0 bottom
TP863 "Comment" ict-smd40 6405,1685 r0 bottom
TP864 "Comment" ict-smd40 6210,1685 r0 bottom
TP865 "Comment" ict-smd40 7450,2460 r0 bottom
TP867 "Comment" ict-smd40 7825,685 r0 bottom
TP868 "Comment" ict-smd40 8045,815 r0 bottom
TP869 "Comment" ict-smd40 8810,565 r0 bottom
TP870 "Comment" ict-smd40 7685,560 r0 bottom
TP871 "Comment" ict-smd40 7295,620 r0 bottom
TP872 "Comment" ict-smd40 7970,870 r0 bottom
TP873 "Comment" ict-smd40 3670,2075 r0 bottom
TP874 "Comment" ict-smd40 3820,2025 r0 bottom
TP875 "Comment" ict-smd40 3960,2040 r0 bottom
TP876 "Comment" ict-smd40 4065,2000 r0 bottom
TP877 "Comment" ict-smd40 4110,2150 r0 bottom
TP878 "Comment" ict-smd40 4590,1755 r0 bottom
TP879 "Comment" ict-smd40 4190,2000 r0 bottom
TP880 "Comment" ict-smd40 4345,2005 r0 bottom
TP881 "Comment" ict-smd40 4720,2010 r0 bottom
TP882 "Comment" ict-smd40 4490,2010 r0 bottom
TP883 "Comment" ict-smd40 4685,1620 r0 bottom
TP884 "Comment" ict-smd40 4825,1710 r0 bottom
TP885 "Comment" ict-smd40 4940,1960 r0 bottom
TP886 "Comment" ict-smd40 4865,2125 r0 bottom
TP887 "Comment" ict-smd40 4805,1970 r0 bottom
TP888 "Comment" ict-smd40 4645,1965 r0 bottom
TP889 "Comment" ict-smd40 4330,1695 r0 bottom
TP890 "Comment" ict-smd40 4510,1635 r0 bottom
TP891 "Comment" ict-smd40 4215,1425 r0 bottom
TP892 "Comment" ict-smd40 4750,600 r0 bottom
TP893 "Comment" ict-smd40 4650,600 r0 bottom
TP894 "Comment" ict-smd40 4455,600 r0 bottom
TP895 "Comment" ict-smd40 4450,500 r0 bottom
TP896 "Comment" ict-smd40 5140,500 r0 bottom
TP897 "Comment" ict-smd40 4670,1510 r0 bottom
TP898 "Comment" ict-smd40 4375,1590 r0 bottom
TP899 "Comment" ict-smd40 230,1110 r0 bottom
TP900 "Comment" ict-smd40 1025,830 r0 bottom
TP901 "Comment" ict-smd40 8045,3560 r0 bottom
TP903 "Comment" ict-smd40 8735,2090 r0 bottom
TP904 "Comment" ict-smd40 8935,1980 r0 bottom
TP905 "Comment" ict-smd40 8880,2205 r0 bottom
TP906 "Comment" ict-smd40 8900,2335 r0 bottom
TP907 "Comment" ict-smd40 8805,1975 r0 bottom
TP908 "Comment" ict-smd40 8720,2515 r0 bottom
TP909 "Comment" ict-smd40 9055,2285 r0 bottom
TP910 "Comment" ict-smd40 8995,2060 r0 bottom
TP911 "Comment" ict-smd40 3235,2250 r0 bottom
TP912 "Comment" ict-smd40 3005,2180 r0 bottom
TP913 "Comment" ict-smd40 3285,2500 r0 bottom
TP914 "Comment" ict-smd40 3130,2445 r0 bottom
TP915 "Comment" ict-smd40 2745,2245 r0 bottom
TP916 "Comment" ict-smd40 2840,2425 r0 bottom
TP917 "Comment" ict-smd40 3525,2520 r0 bottom
TP918 "Comment" ict-smd40 3530,2305 r0 bottom
TP919 "Comment" ict-smd40 7565,3030 r0 bottom
TP920 "Comment" ict-smd40 7565,2805 r0 bottom
TP921 "Comment" ict-smd40 2395,360 r0 bottom
TP922 "Comment" ict-smd40 2405,230 r0 bottom
TP923 "Comment" ict-smd40 2130,510 r0 bottom
TP924 "Comment" ict-smd40 2030,505 r0 bottom
TP925 "Comment" ict-smd40 2945,2630 r0 bottom
TP926 "Comment" ict-smd40 2950,2490 r0 bottom
TP927 "Comment" ict-smd40 8995,2540 r0 bottom
TP928 "Comment" ict-smd40 8875,2550 r0 bottom
TP929 "Comment" ict-smd40 10275,805 r0 bottom
TP930 "Comment" ict-smd40 10400,1115 r0 bottom
TP931 "Comment" ict-smd40 10470,2445 r0 bottom
TP932 "Comment" ict-smd40 10045,1175 r0 bottom
TP933 "Comment" ict-smd40 5545,550 r0 bottom
TP934 "Comment" ict-smd40 5425,650 r0 bottom
TP935 "Comment" ict-smd40 5375,580 r0 bottom
TP936 "Comment" ict-smd40 5650,545 r0 bottom
TP937 "Comment" ict-smd40 7275,1415 r0 bottom
TP938 "Comment" ict-smd40 5860,1590 r0 bottom
TP939 "Comment" ict-smd40 5810,1465 r0 bottom
TP940 "Comment" ict-smd40 5645,1465 r0 bottom
TP941 "Comment" ict-smd40 5270,895 r0 bottom
TP942 "Comment" ict-smd40 7095,3715 r0 bottom
TP943 "Comment" ict-smd40 250,1725 r0 bottom
TP944 "Comment" ict-smd40 200,2070 r0 bottom
TP945 "Comment" ict-smd40 305,2020 r0 bottom
TP946 "Comment" ict-smd40 725,1930 r0 bottom
TP947 "Comment" ict-smd40 580,2315 r0 bottom
TP948 "Comment" ict-smd40 705,2315 r0 bottom
TP949 "Comment" ict-smd40 225,3340 r0 bottom
TP950 "Comment" ict-smd40 280,3095 r0 bottom
TP951 "Comment" ict-smd40 270,2350 r0 bottom
TP952 "Comment" ict-smd40 8480,3995 r0 bottom
TP953 "Comment" ict-smd40 5725,650 r0 bottom
TP954 "Comment" ict-smd40 6975,3775 r0 bottom
TP956 "Comment" ict-smd40 10000,1880 r0 bottom
TP966 "Comment" ict-smd40 8610,2255 r0 bottom
TP968 "Comment" ict-smd40 8380,1900 r0 bottom
TP969 "Comment" ict-smd40 1500,855 r0 bottom
TP970 "Comment" ict-smd40 9170,1630 r0 bottom
TP971 "Comment" ict-smd40 8405,2220 r0 bottom
TP974 "Comment" ict-smd40 2855,2710 r0 bottom
TP975 "Comment" ict-smd40 2320,1870 r0 bottom
TP979 "Comment" ict-smd40 285,5930 r0 bottom
TP980 "Comment" ict-smd40 610,6370 r0 bottom
TP981 "Comment" ict-smd40 480,5930 r0 bottom
TP982 "Comment" ict-smd40 290,6575 r0 bottom
TP983 "Comment" ict-smd40 415,6635 r0 bottom
TP984 "Comment" ict-smd40 235,6455 r0 bottom
TP985 "Comment" ict-smd40 175,5705 r0 bottom
TP986 "Comment" ict-smd40 260,6140 r0 bottom
TP987 "Comment" ict-smd40 150,6455 r0 bottom
TP988 "Comment" ict-smd40 5435,7770 r0 bottom
TP989 "Comment" ict-smd40 5585,7800 r0 bottom
TP990 "Comment" ict-smd40 5375,7235 r0 bottom
TP991 "Comment" ict-smd40 5660,7265 r0 bottom
TP992 "Comment" ict-smd40 5380,6795 r0 bottom
TP993 "Comment" ict-smd40 5615,6805 r0 bottom
TP994 "Comment" ict-smd40 5590,6510 r0 bottom
TP995 "Comment" ict-smd40 3210,7670 r0 bottom
TP996 "Comment" ict-smd40 2960,7165 r0 bottom
TP997 "Comment" ict-smd40 2880,7715 r0 bottom
TP998 "Comment" ict-smd40 5375,7445 r0 bottom
TP999 "Comment" ict-smd40 5630,7600 r0 bottom
TP1000 "Comment" ict-smd40 5710,7030 r0 bottom
TP1001 "Comment" ict-smd40 5540,6955 r0 bottom
TP1002 "Comment" ict-smd40 5485,6405 r0 bottom
TP1003 "Comment" ict-smd40 2895,6935 r0 bottom
TP1004 "Comment" ict-smd40 2910,7515 r0 bottom
TP1005 "Comment" ict-smd40 2355,6425 r0 bottom
TP1006 "Comment" ict-smd40 1890,6795 r0 bottom
TP1007 "Comment" ict-smd40 2050,6715 r90 bottom
TP1008 "Comment" ict-smd40 2000,6425 r0 bottom
TP1009 "Comment" ict-smd40 1770,7265 r0 bottom
TP1010 "Comment" ict-smd40 2020,7210 r0 bottom
TP1011 "Comment" ict-smd40 1780,7760 r0 bottom
TP1012 "Comment" ict-smd40 2015,7850 r0 bottom
TP1013 "Comment" ict-smd40 1940,7470 r0 bottom
TP1014 "Comment" ict-smd40 3005,7635 r0 bottom
TP1015 "Comment" ict-smd40 2550,7630 r0 bottom
TP1016 "Comment" ict-smd40 2620,7255 r0 bottom
TP1017 "Comment" ict-smd40 1850,6445 r0 bottom
TP1018 "Comment" ict-smd40 1880,6970 r0 bottom
TP1019 "Comment" ict-smd40 1810,7520 r0 bottom
TP1020 "Comment" ict-smd40 2710,6900 r0 bottom
TP1021 "Comment" ict-smd40 2755,7420 r0 bottom
TP1022 "Comment" ict-smd40 3195,7330 r0 bottom
TP1023 "Comment" ict-smd40 2395,6730 r0 bottom
TP1024 "Comment" ict-smd40 2240,6710 r0 bottom
TP1025 "Comment" ict-smd40 2395,7365 r0 bottom
TP1026 "Comment" ict-smd40 2125,7240 r0 bottom
TP1027 "Comment" ict-smd40 2445,7850 r0 bottom
TP1028 "Comment" ict-smd40 2065,7700 r0 bottom
TP1029 "Comment" ict-smd40 8605,6760 r0 bottom
TP1030 "Comment" ict-smd40 8180,6405 r0 bottom
TP1031 "Comment" ict-smd40 7850,7465 r0 bottom
TP1032 "Comment" ict-smd40 7845,7595 r0 bottom
TP1033 "Comment" ict-smd40 8505,7810 r0 bottom
TP1034 "Comment" ict-smd40 8420,7810 r0 bottom
TP1035 "Comment" ict-smd40 8610,6995 r0 bottom
TP1036 "Comment" ict-smd40 8345,6970 r0 bottom
TP1037 "Comment" ict-smd40 8595,7300 r0 bottom
TP1038 "Comment" ict-smd40 8250,7155 r0 bottom
TP1039 "Comment" ict-smd40 8220,7405 r0 bottom
TP1040 "Comment" ict-smd40 8270,6410 r0 bottom
TP1041 "Comment" ict-smd40 2235,6435 r0 bottom
TP1042 "Comment" ict-smd40 2140,7450 r0 bottom
TP1043 "Comment" ict-smd40 2455,7250 r0 bottom
TP1044 "Comment" ict-smd40 2225,6910 r0 bottom
TP1045 "Comment" ict-smd40 2515,7725 r0 bottom
TP1046 "Comment" ict-smd40 7860,5930 r0 bottom
TP1047 "Comment" ict-smd40 7835,5630 r0 bottom
TP1048 "Comment" ict-smd40 7580,5950 r0 bottom
TP1049 "Comment" ict-smd40 7810,5445 r0 bottom
TP1050 "Comment" ict-smd40 7770,5565 r0 bottom
TP1051 "Comment" ict-smd40 7900,5270 r0 bottom
TP1053 "Comment" ict-smd40 8100,7275 r0 bottom
TP1054 "Comment" ict-smd40 7815,7095 r0 bottom
TP1055 "Comment" ict-smd40 8175,6700 r0 bottom
TP1056 "Comment" ict-smd40 7875,6635 r0 bottom
TP1057 "Comment" ict-smd40 8415,4245 r0 bottom
TP1058 "Comment" ict-smd40 3770,6875 r0 bottom
TP1059 "Comment" ict-smd40 3885,7330 r0 bottom
TP1060 "Comment" ict-smd40 890,285 r0 bottom
TP1061 "Comment" ict-smd40 4295,7030 r0 bottom
TP1062 "Comment" ict-smd40 4275,7455 r0 bottom
TP1063 "Comment" ict-smd40 4130,7445 r0 bottom
TP1064 "Comment" ict-smd40 3715,7705 r0 bottom
TP1065 "Comment" ict-smd40 3570,7405 r0 bottom
TP1066 "Comment" ict-smd40 3935,6785 r0 bottom
TP1067 "Comment" ict-smd40 4335,7110 r0 bottom
TP1068 "Comment" ict-smd40 3435,7860 r0 bottom
TP1069 "Comment" ict-smd40 3675,7805 r0 bottom
TP1070 "Comment" ict-smd40 7945,6915 r0 bottom
TP1071 "Comment" ict-smd40 7955,6410 r0 bottom
TP1072 "Comment" ict-smd40 4910,6790 r0 bottom
TP1073 "Comment" ict-smd40 5240,7055 r0 bottom
TP1074 "Comment" ict-smd40 5100,7235 r0 bottom
TP1075 "Comment" ict-smd40 5205,7205 r0 bottom
TP1076 "Comment" ict-smd40 5030,5845 r0 bottom
TP1077 "Comment" ict-smd40 5045,6125 r0 bottom
TP1078 "Comment" ict-smd40 5225,5910 r0 bottom
TP1079 "Comment" ict-smd40 4515,6880 r0 bottom
TP1080 "Comment" ict-smd40 4665,7105 r0 bottom
TP1081 "Comment" ict-smd40 4550,7255 r0 bottom
TP1082 "Comment" ict-smd40 4540,7360 r0 bottom
TP1083 "Comment" ict-smd40 455,7475 r0 bottom
TP1084 "Comment" ict-smd40 4190,4345 r0 bottom
TP1085 "Comment" ict-smd40 4320,4360 r0 bottom
TP1086 "Comment" ict-smd40 5080,6380 r0 bottom
TP1087 "Comment" ict-smd40 5250,6645 r0 bottom
TP1088 "Comment" ict-smd40 5405,6110 r0 bottom
TP1089 "Comment" ict-smd40 5575,5720 r0 bottom
TP1090 "Comment" ict-smd40 5550,5195 r0 bottom
TP1091 "Comment" ict-smd40 5330,5440 r0 bottom
TP1095 "Comment" ict-smd40 4885,6600 r0 bottom
TP1096 "Comment" ict-smd40 8355,5495 r0 bottom
TP1097 "Comment" ict-smd40 8820,6790 r0 bottom
TP1098 "Comment" ict-smd40 8250,6140 r0 bottom
TP1099 "Comment" ict-smd40 8905,7020 r0 bottom
TP1100 "Comment" ict-smd40 8570,6300 r0 bottom
TP1101 "Comment" ict-smd40 8825,7335 r0 bottom
TP1102 "Comment" ict-smd40 8725,7150 r0 bottom
TP1103 "Comment" ict-smd40 4775,6180 r0 bottom
TP1104 "Comment" ict-smd40 4555,5900 r0 bottom
TP1105 "Comment" ict-smd40 4770,5600 r0 bottom
TP1106 "Comment" ict-smd40 4930,4765 r0 bottom
TP1107 "Comment" ict-smd40 4430,5545 r0 bottom
TP1108 "Comment" ict-smd40 4965,5505 r0 bottom
TP1109 "Comment" ict-smd40 4655,5930 r0 bottom
TP1114 "Comment" ict-smd40 4440,5230 r0 bottom
TP1115 "Comment" ict-smd40 4615,5025 r0 bottom
TP1116 "Comment" ict-smd40 4460,4445 r0 bottom
TP1117 "Comment" ict-smd40 4520,4710 r0 bottom
TP1118 "Comment" ict-smd40 4860,4685 r0 bottom
TP1122 "Comment" ict-smd40 4375,6430 r0 bottom
TP1123 "Comment" ict-smd40 4750,6675 r0 bottom
TP1124 "Comment" ict-smd40 4640,6475 r0 bottom
TP1125 "Comment" ict-smd40 4110,5305 r0 bottom
TP1126 "Comment" ict-smd40 4190,5680 r0 bottom
TP1127 "Comment" ict-smd40 4170,5565 r0 bottom
TP1128 "Comment" ict-smd40 7640,7695 r0 bottom
TP1129 "Comment" ict-smd40 7650,7430 r0 bottom
TP1130 "Comment" ict-smd40 6555,4940 r0 bottom
TP1131 "Comment" ict-smd40 6520,5380 r0 bottom
TP1132 "Comment" ict-smd40 6585,5925 r0 bottom
TP1133 "Comment" ict-smd40 6700,5885 r0 bottom
TP1134 "Comment" ict-smd40 6665,5645 r0 bottom
TP1135 "Comment" ict-smd40 6470,5185 r0 bottom
TP1136 "Comment" ict-smd40 7580,6640 r0 bottom
TP1137 "Comment" ict-smd40 7545,6550 r0 bottom
TP1138 "Comment" ict-smd40 7255,7845 r0 bottom
TP1139 "Comment" ict-smd40 7370,7380 r0 bottom
TP1140 "Comment" ict-smd40 7340,7840 r0 bottom
TP1141 "Comment" ict-smd40 7300,6680 r0 bottom
TP1142 "Comment" ict-smd40 7200,6680 r0 bottom
TP1143 "Comment" ict-smd40 7095,7640 r0 bottom
TP1145 "Comment" ict-smd40 7030,7850 r0 bottom
TP1146 "Comment" ict-smd40 6940,6735 r0 bottom
TP1147 "Comment" ict-smd40 6860,6670 r0 bottom
TP1148 "Comment" ict-smd40 6970,6420 r0 bottom
TP1149 "Comment" ict-smd40 7415,6505 r0 bottom
TP1150 "Comment" ict-smd40 5865,5080 r0 bottom
TP1151 "Comment" ict-smd40 5865,5375 r0 bottom
TP1152 "Comment" ict-smd40 5855,5725 r0 bottom
TP1153 "Comment" ict-smd40 5915,5630 r0 bottom
TP1154 "Comment" ict-smd40 7180,4950 r0 bottom
TP1155 "Comment" ict-smd40 7170,4865 r0 bottom
TP1158 "Comment" ict-smd40 5720,5310 r0 bottom
TP1159 "Comment" ict-smd40 6075,5545 r0 bottom
TP1161 "Comment" ict-smd40 6575,7855 r0 bottom
TP1162 "Comment" ict-smd40 6745,7415 r180 bottom
TP1163 "Comment" ict-smd40 6700,7870 r0 bottom
TP1164 "Comment" ict-smd40 6725,6670 r0 bottom
TP1165 "Comment" ict-smd40 6430,6600 r0 bottom
TP1166 "Comment" ict-smd40 6260,7425 r0 bottom
TP1169 "Comment" ict-smd40 6275,6730 r0 bottom
TP1170 "Comment" ict-smd40 6175,6670 r0 bottom
TP1173 "Comment" ict-smd40 6045,6720 r0 bottom
TP1174 "Comment" ict-smd40 5810,6675 r0 bottom
TP1175 "Comment" ict-smd40 6740,6505 r0 bottom
TP1176 "Comment" ict-smd40 6295,5930 r0 bottom
TP1177 "Comment" ict-smd40 6170,5860 r0 bottom
TP1178 "Comment" ict-smd40 6305,4925 r0 bottom
TP1179 "Comment" ict-smd40 6190,5075 r0 bottom
TP1180 "Comment" ict-smd40 6335,5185 r0 bottom
TP1181 "Comment" ict-smd40 7525,7845 r0 bottom
TP1182 "Comment" ict-smd40 7605,7270 r0 bottom
TP1183 "Comment" ict-smd40 7565,7395 r0 bottom
TP1184 "Comment" ict-smd40 7590,7185 r0 bottom
TP1185 "Comment" ict-smd40 7565,7075 r0 bottom
TP1186 "Comment" ict-smd40 7640,7010 r0 bottom
TP1187 "Comment" ict-smd40 7090,7540 r0 bottom
TP1188 "Comment" ict-smd40 7270,7310 r0 bottom
TP1189 "Comment" ict-smd40 7150,7305 r0 bottom
TP1190 "Comment" ict-smd40 7265,7210 r0 bottom
TP1191 "Comment" ict-smd40 6865,7825 r0 bottom
TP1192 "Comment" ict-smd40 6870,7275 r0 bottom
TP1193 "Comment" ict-smd40 6780,7315 r0 bottom
TP1194 "Comment" ict-smd40 6930,7210 r0 bottom
TP1195 "Comment" ict-smd40 7045,6980 r0 bottom
TP1196 "Comment" ict-smd40 7390,7005 r0 bottom
TP1197 "Comment" ict-smd40 6660,4700 r0 bottom
TP1198 "Comment" ict-smd40 6870,4645 r0 bottom
TP1199 "Comment" ict-smd40 6580,4510 r0 bottom
TP1200 "Comment" ict-smd40 6775,4355 r0 bottom
TP1201 "Comment" ict-smd40 6915,4945 r0 bottom
TP1202 "Comment" ict-smd40 6810,5400 r0 bottom
TP1203 "Comment" ict-smd40 6800,5960 r0 bottom
TP1204 "Comment" ict-smd40 6820,5870 r0 bottom
TP1205 "Comment" ict-smd40 7005,5215 r0 bottom
TP1206 "Comment" ict-smd40 6980,4600 r0 bottom
TP1207 "Comment" ict-smd40 7050,6040 r0 bottom
TP1208 "Comment" ict-smd40 6510,7415 r0 bottom
TP1209 "Comment" ict-smd40 6590,7235 r0 bottom
TP1210 "Comment" ict-smd40 6545,7325 r0 bottom
TP1211 "Comment" ict-smd40 6445,7060 r0 bottom
TP1212 "Comment" ict-smd40 6175,7420 r0 bottom
TP1213 "Comment" ict-smd40 6270,7265 r0 bottom
TP1214 "Comment" ict-smd40 6115,7225 r0 bottom
TP1215 "Comment" ict-smd40 6225,7185 r0 bottom
TP1216 "Comment" ict-smd40 6200,7100 r0 bottom
TP1217 "Comment" ict-smd40 5915,7305 r0 bottom
TP1218 "Comment" ict-smd40 5795,7305 r0 bottom
TP1219 "Comment" ict-smd40 5935,7210 r0 bottom
TP1220 "Comment" ict-smd40 5855,7115 r0 bottom
TP1221 "Comment" ict-smd40 6015,6925 r0 bottom
TP1222 "Comment" ict-smd40 6705,7005 r0 bottom
TP1223 "Comment" ict-smd40 6515,7110 r0 bottom
TP1236 "Comment" ict-smd40 3960,4515 r0 bottom
TP1253 "Comment" ict-smd40 7300,5580 r0 bottom
TP1254 "Comment" ict-smd40 7205,5590 r0 bottom
TP1255 "Comment" ict-smd40 7290,5420 r0 bottom
TP1258 "Comment" ict-smd40 7420,5965 r0 bottom
TP1259 "Comment" ict-smd40 5745,6180 r0 bottom
TP1260 "Comment" ict-smd40 5930,6015 r0 bottom
TP1271 "Comment" ict-smd40 5505,4990 r0 bottom
TP1272 "Comment" ict-smd40 5485,5110 r0 bottom
TP1273 "Comment" ict-smd40 5030,5250 r0 bottom
TP1274 "Comment" ict-smd40 5015,5415 r0 bottom
TP1275 "Comment" ict-smd40 5010,5735 r0 bottom
TP1276 "Comment" ict-smd40 4035,6505 r0 bottom
TP1277 "Comment" ict-smd40 4130,6120 r0 bottom
TP1278 "Comment" ict-smd40 4120,6580 r0 bottom
TP1279 "Comment" ict-smd40 4305,6575 r0 bottom
TP1280 "Comment" ict-smd40 5515,4445 r0 bottom
TP1281 "Comment" ict-smd40 5630,4740 r0 bottom
TP1282 "Comment" ict-smd40 5570,4845 r0 bottom
TP1283 "Comment" ict-smd40 5390,4745 r0 bottom
TP1284 "Comment" ict-smd40 4250,6425 r0 bottom
TP1285 "Comment" ict-smd40 4160,6425 r0 bottom
TP1286 "Comment" ict-smd40 5135,5405 r0 bottom
TP1287 "Comment" ict-smd40 5090,5320 r0 bottom
TP1288 "Comment" ict-smd40 8605,5845 r0 bottom
TP1289 "Comment" ict-smd40 8765,6360 r0 bottom
TP1290 "Comment" ict-smd40 8655,6280 r0 bottom
TP1291 "Comment" ict-smd40 9150,6065 r0 bottom
TP1292 "Comment" ict-smd40 10280,5965 r0 bottom
TP1298 "Comment" ict-smd40 9525,5885 r0 bottom
TP1300 "Comment" ict-smd40 9145,6170 r0 bottom
TP1301 "Comment" ict-smd40 10435,2850 r0 bottom
TP1302 "Comment" ict-smd40 10290,2855 r0 bottom
TP1303 "Comment" ict-smd40 10225,5845 r0 bottom
TP1304 "Comment" ict-smd40 9870,7440 r0 bottom
TP1305 "Comment" ict-smd40 9900,7050 r0 bottom
TP1308 "Comment" ict-smd40 9390,7385 r0 bottom
TP1309 "Comment" ict-smd40 9395,6990 r0 bottom
TP1310 "Comment" ict-smd40 9390,7600 r0 bottom
TP1311 "Comment" ict-smd40 9490,7295 r0 bottom
TP1312 "Comment" ict-smd40 10075,7440 r0 bottom
TP1313 "Comment" ict-smd40 10045,7055 r0 bottom
TP1314 "Comment" ict-smd40 10255,7675 r0 bottom
TP1316 "Comment" ict-smd40 10300,7450 r0 bottom
TP1317 "Comment" ict-smd40 10340,7050 r0 bottom
TP1318 "Comment" ict-smd40 10510,7500 r0 bottom
TP1319 "Comment" ict-smd40 10510,7240 r0 bottom
TP1320 "Comment" ict-smd40 9725,7440 r0 bottom
TP1321 "Comment" ict-smd40 9720,6980 r0 bottom
TP1322 "Comment" ict-smd40 9755,7590 r0 bottom
TP1323 "Comment" ict-smd40 9680,7305 r0 bottom
TP1325 "Comment" ict-smd40 10485,6900 r0 bottom
TP1326 "Comment" ict-smd40 9720,6885 r0 bottom
TP1327 "Comment" ict-smd40 9900,6835 r0 bottom
TP1328 "Comment" ict-smd40 9360,6835 r0 bottom
TP1329 "Comment" ict-smd40 10295,6830 r0 bottom
TP1330 "Comment" ict-smd40 9990,6825 r0 bottom
TP1332 "Comment" ict-smd40 10210,6820 r0 bottom
TP1333 "Comment" ict-smd40 8160,3160 r0 bottom
TP1334 "Comment" ict-smd40 9480,6790 r0 bottom
TP1335 "Comment" ict-smd40 890,7360 r0 bottom
TP1336 "Comment" ict-smd40 935,7275 r0 bottom
TP1339 "Comment" ict-smd40 455,7175 r0 bottom
TP1340 "Comment" ict-smd40 475,7075 r0 bottom
TP1341 "Comment" ict-smd40 715,6935 r0 bottom
TP1342 "Comment" ict-smd40 7825,4615 r0 bottom
TP1343 "Comment" ict-smd40 8055,4630 r0 bottom
TP1344 "Comment" ict-smd40 725,7285 r0 bottom
TP1345 "Comment" ict-smd40 8540,2630 r0 bottom
TP1346 "Comment" ict-smd40 8390,2735 r0 bottom
TP1347 "Comment" ict-smd40 8490,2720 r0 bottom
TP1348 "Comment" ict-smd40 7960,505 r0 bottom
TP1349 "Comment" ict-smd40 7825,280 r0 bottom
TP1350 "Comment" ict-smd40 685,1130 r0 bottom
TP1351 "Comment" ict-smd40 490,1090 r0 bottom
TP1352 "Comment" ict-smd40 1270,500 r0 bottom
TP1353 "Comment" ict-smd40 825,655 r0 bottom
TP1354 "Comment" ict-smd40 750,7565 r0 bottom
TP1355 "Comment" ict-smd40 8325,3150 r0 bottom
TP1356 "Comment" ict-smd40 6710,3670 r0 bottom
TP1357 "Comment" ict-smd40 6585,3735 r0 bottom
TP1358 "Comment" ict-smd40 6965,3680 r0 bottom
TP1359 "Comment" ict-smd40 6835,3675 r0 bottom
TP1360 "Comment" ict-smd40 6755,3300 r0 bottom
TP1361 "Comment" ict-smd40 6580,3445 r0 bottom
TP1362 "Comment" ict-smd40 6925,3260 r0 bottom
TP1363 "Comment" ict-smd40 6390,3755 r0 bottom
TP1364 "Comment" ict-smd40 6205,3690 r0 bottom
TP1365 "Comment" ict-smd40 6210,3295 r0 bottom
TP1366 "Comment" ict-smd40 6035,3440 r0 bottom
TP1367 "Comment" ict-smd40 6545,3085 r0 bottom
TP1368 "Comment" ict-smd40 6180,3175 r0 bottom
TP1369 "Comment" ict-smd40 6050,3695 r0 bottom
TP1370 "Comment" ict-smd40 6005,3810 r0 bottom
TP1371 "Comment" ict-smd40 1020,7100 r0 bottom
TP1372 "Comment" ict-smd40 1130,7560 r0 bottom
TP1373 "Comment" ict-smd40 1555,7440 r0 bottom
TP1374 "Comment" ict-smd40 1285,7440 r0 bottom
TP1375 "Comment" ict-smd40 6860,3320 r0 bottom
TP1376 "Comment" ict-smd40 5670,3675 r0 bottom
TP1377 "Comment" ict-smd40 5485,3770 r0 bottom
TP1378 "Comment" ict-smd40 5875,3770 r0 bottom
TP1379 "Comment" ict-smd40 5760,3675 r0 bottom
TP1380 "Comment" ict-smd40 5710,3440 r0 bottom
TP1381 "Comment" ict-smd40 5485,3435 r0 bottom
TP1388 "Comment" ict-smd40 4220,2930 r0 bottom
TP1389 "Comment" ict-smd40 3810,3475 r0 bottom
TP1390 "Comment" ict-smd40 4605,3015 r0 bottom
TP1391 "Comment" ict-smd40 4255,3030 r0 bottom
TP1398 "Comment" ict-smd40 4960,2880 r0 bottom
TP1403 "Comment" ict-smd40 4010,3420 r0 bottom
TP1404 "Comment" ict-smd40 3850,3280 r0 bottom
TP1405 "Comment" ict-smd40 3915,2890 r0 bottom
TP1406 "Comment" ict-smd40 3920,3085 r0 bottom
TP1407 "Comment" ict-smd40 7395,3490 r0 bottom
TP1408 "Comment" ict-smd40 7605,3380 r0 bottom
TP1409 "Comment" ict-smd40 6980,3325 r0 bottom
TP1410 "Comment" ict-smd40 5815,2890 r0 bottom
TP1411 "Comment" ict-smd40 5850,3125 r0 bottom
TP1412 "Comment" ict-smd40 4585,2890 r0 bottom
TP1413 "Comment" ict-smd40 4920,3005 r0 bottom
TP1414 "Comment" ict-smd40 3565,2875 r0 bottom
TP1415 "Comment" ict-smd40 3655,2870 r0 bottom
TP1416 "Comment" ict-smd40 3740,2885 r0 bottom
TP1417 "Comment" ict-smd40 3760,5420 r0 bottom
TP1418 "Comment" ict-smd40 3700,5485 r0 bottom
TP1419 "Comment" ict-smd40 3540,5780 r0 bottom
TP1420 "Comment" ict-smd40 3860,5540 r0 bottom
TP1421 "Comment" ict-smd40 3755,5950 r0 bottom
TP1422 "Comment" ict-smd40 3525,5950 r0 bottom
TP1423 "Comment" ict-smd40 3945,5940 r0 bottom
TP1424 "Comment" ict-smd40 3960,6110 r0 bottom
TP1425 "Comment" ict-smd40 3650,6850 r0 bottom
TP1426 "Comment" ict-smd40 3510,6190 r0 bottom
TP1427 "Comment" ict-smd40 3720,6725 r0 bottom
TP1428 "Comment" ict-smd40 3815,6765 r0 bottom
TP1429 "Comment" ict-smd40 3515,6935 r0 bottom
TP1430 "Comment" ict-smd40 3490,6745 r0 bottom
TP1431 "Comment" ict-smd40 3470,7025 r0 bottom
TP1432 "Comment" ict-smd40 3480,7185 r0 bottom
TP1433 "Comment" ict-smd40 3385,6750 r0 bottom
TP1434 "Comment" ict-smd40 3045,6490 r0 bottom
TP1435 "Comment" ict-smd40 3175,6735 r0 bottom
TP1436 "Comment" ict-smd40 3220,6935 r0 bottom
TP1437 "Comment" ict-smd40 3390,6865 r0 bottom
TP1438 "Comment" ict-smd40 3395,7260 r0 bottom
TP1439 "Comment" ict-smd40 3060,7230 r0 bottom
TP1440 "Comment" ict-smd40 3165,7220 r0 bottom
TP1441 "Comment" ict-smd40 4270,4990 r0 bottom
TP1442 "Comment" ict-smd40 1495,275 r0 bottom
TP1443 "Comment" ict-smd40 3820,7170 r0 bottom
TP1444 "Comment" ict-smd40 3885,4570 r0 bottom
TP1445 "Comment" ict-smd40 3520,4815 r0 bottom
TP1446 "Comment" ict-smd40 3575,4990 r0 bottom
TP1447 "Comment" ict-smd40 3755,4765 r0 bottom
TP1448 "Comment" ict-smd40 3535,4695 r0 bottom
TP1449 "Comment" ict-smd40 3535,4500 r0 bottom
TP1450 "Comment" ict-smd40 3530,4595 r0 bottom
TP1451 "Comment" ict-smd40 3955,6025 r0 bottom
TP1452 "Comment" ict-smd40 3370,6970 r0 bottom
TP1453 "Comment" ict-smd40 305,7700 r270 bottom
TP1454 "Comment" ict-smd40 3535,6050 r0 bottom
TP1455 "Comment" ict-smd40 3250,7220 r0 bottom
TP1456 "Comment" ict-smd40 2620,6460 r0 bottom
TP1457 "Comment" ict-smd40 2595,6275 r0 bottom
TP1458 "Comment" ict-smd40 2785,6600 r0 bottom
TP1459 "Comment" ict-smd40 2740,6420 r0 bottom
TP1460 "Comment" ict-smd40 2470,6275 r0 bottom
TP1461 "Comment" ict-smd40 2560,6195 r0 bottom
TP1462 "Comment" ict-smd40 2870,6405 r0 bottom
TP1463 "Comment" ict-smd40 2375,6230 r0 bottom
TP1464 "Comment" ict-smd40 2715,6670 r0 bottom
TP1465 "Comment" ict-smd40 4275,5160 r0 bottom
TP1466 "Comment" ict-smd40 8625,3160 r0 bottom
TP1467 "Comment" ict-smd40 8935,3055 r0 bottom
TP1468 "Comment" ict-smd40 9235,2950 r0 bottom
TP1469 "Comment" ict-smd40 9540,3050 r0 bottom
TP1470 "Comment" ict-smd40 9080,3050 r0 bottom
TP1471 "Comment" ict-smd40 8800,2955 r0 bottom
TP1472 "Comment" ict-smd40 1830,3085 r0 bottom
TP1473 "Comment" ict-smd40 2530,3170 r0 bottom
TP1474 "Comment" ict-smd40 2410,2395 r0 bottom
TP1475 "Comment" ict-smd40 2530,2595 r0 bottom
TP1476 "Comment" ict-smd40 2030,2540 r0 bottom
TP1477 "Comment" ict-smd40 1685,2600 r0 bottom
TP1478 "Comment" ict-smd40 1635,2980 r0 bottom
TP1479 "Comment" ict-smd40 2050,3065 r0 bottom
TP1480 "Comment" ict-smd40 1880,2300 r0 bottom
TP1481 "Comment" ict-smd40 2250,2190 r0 bottom
TP1482 "Comment" ict-smd40 1340,2185 r0 bottom
TP1483 "Comment" ict-smd40 1505,2585 r0 bottom
TP1484 "Comment" ict-smd40 9970,3160 r0 bottom
TP1485 "Comment" ict-smd40 9670,3150 r0 bottom
TP1486 "Comment" ict-smd40 8475,3155 r0 bottom
TP1487 "Comment" ict-smd40 10150,2845 r0 bottom
TP1488 "Comment" ict-smd40 9830,3160 r0 bottom
TP1489 "Comment" ict-smd40 9375,3150 r0 bottom
TP1490 "Comment" ict-smd40 995,745 r0 bottom
TP1491 "Comment" ict-smd40 8545,155 r0 bottom
TP1492 "Comment" ict-smd40 8700,235 r0 bottom
TP1493 "Comment" ict-smd40 1215,705 r0 bottom
TP1494 "Comment" ict-smd40 3750,4340 r0 bottom
TP1495 "Comment" ict-smd40 4005,4380 r0 bottom
TP1498 "Comment" ict-smd40 10155,5300 r0 bottom
TP1501 "Comment" ict-smd40 10350,5360 r0 bottom
TP1502 "Comment" ict-smd40 10325,4025 r0 bottom
TP1504 "Comment" ict-smd40 10360,5275 r0 bottom
TP1506 "Comment" ict-smd40 9980,5265 r0 bottom
TP1507 "Comment" ict-smd40 10215,5015 r0 bottom
TP1508 "Comment" ict-smd40 10225,3690 r0 bottom
TP1509 "Comment" ict-smd40 10060,3700 r0 bottom
TP1510 "Comment" ict-smd40 10220,4420 r0 bottom
TP1511 "Comment" ict-smd40 10355,4655 r0 bottom
TP1513 "Comment" ict-smd40 10350,4490 r0 bottom
TP1514 "Comment" ict-smd40 9960,3570 r0 bottom
TP1515 "Comment" ict-smd40 3880,4345 r0 bottom
TP1516 "Comment" ict-smd40 3855,4200 r0 bottom
TP1517 "Comment" ict-smd40 9600,3695 r0 bottom
TP1518 "Comment" ict-smd40 9345,3745 r0 bottom